# Altium PCB music_51.PcbDoc
Units mil, origin at the board's own origin, x right, y up, seen from the top; angles counter-clockwise.
Board outline 3685.33 x 2060.08 mil, 2 copper layers (Top Layer, Bottom Layer); 137 components, 55 nets, 407 pads, 160 vias.
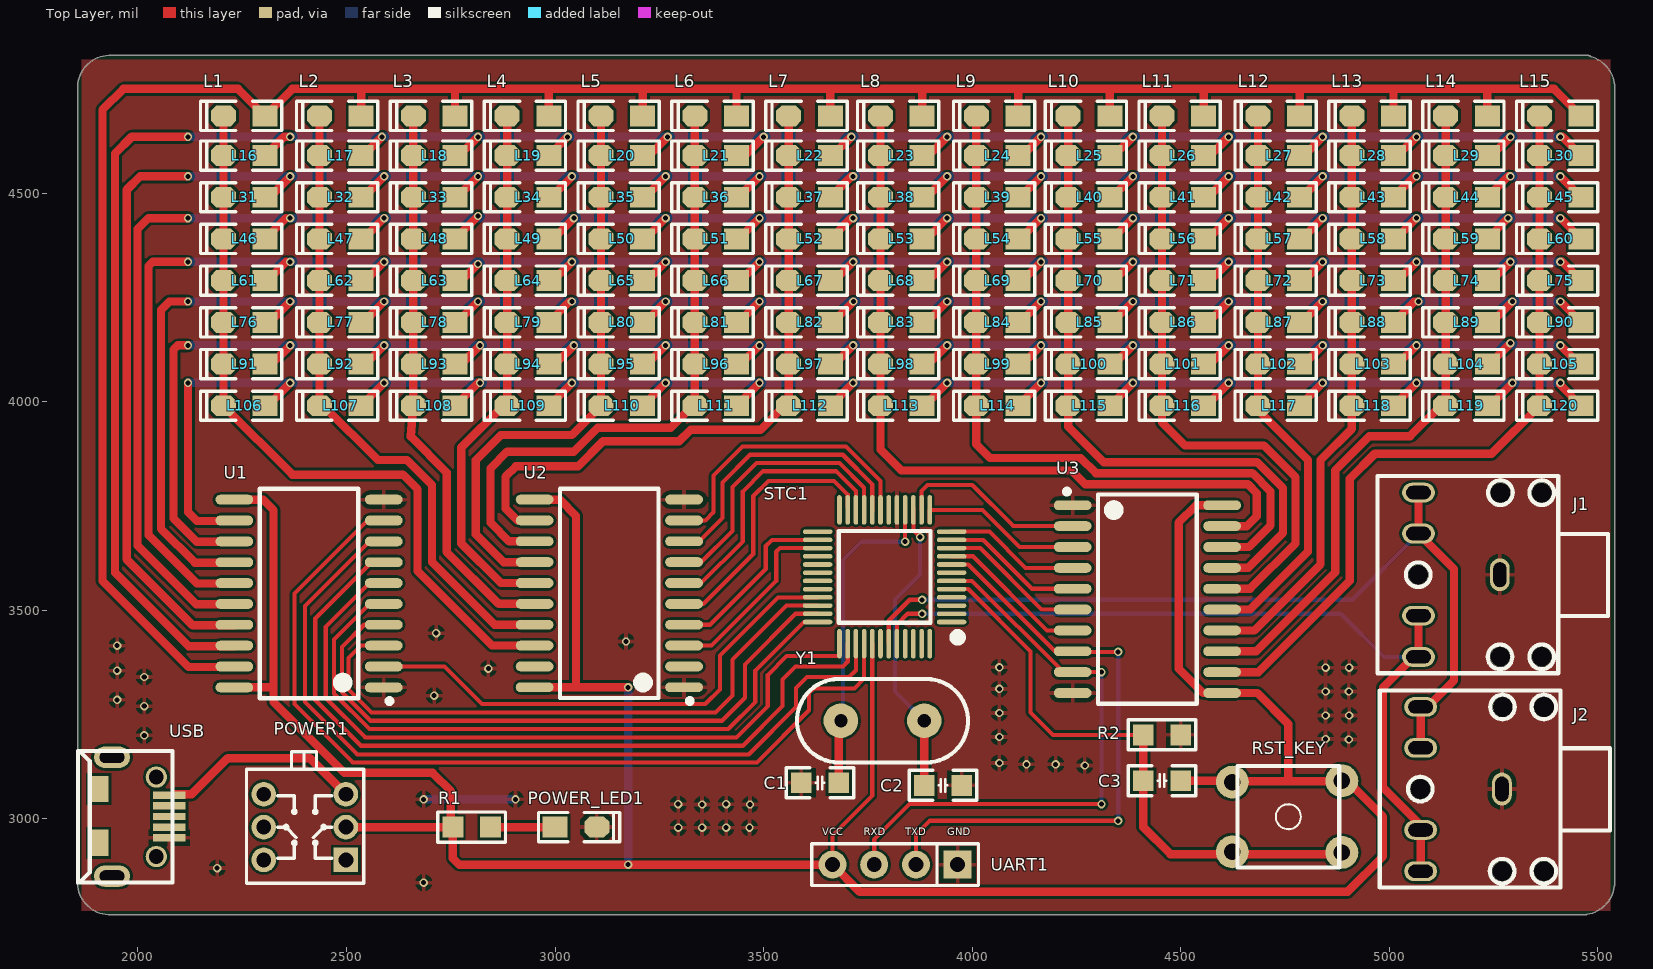
[diagram p0: Top Layer view]
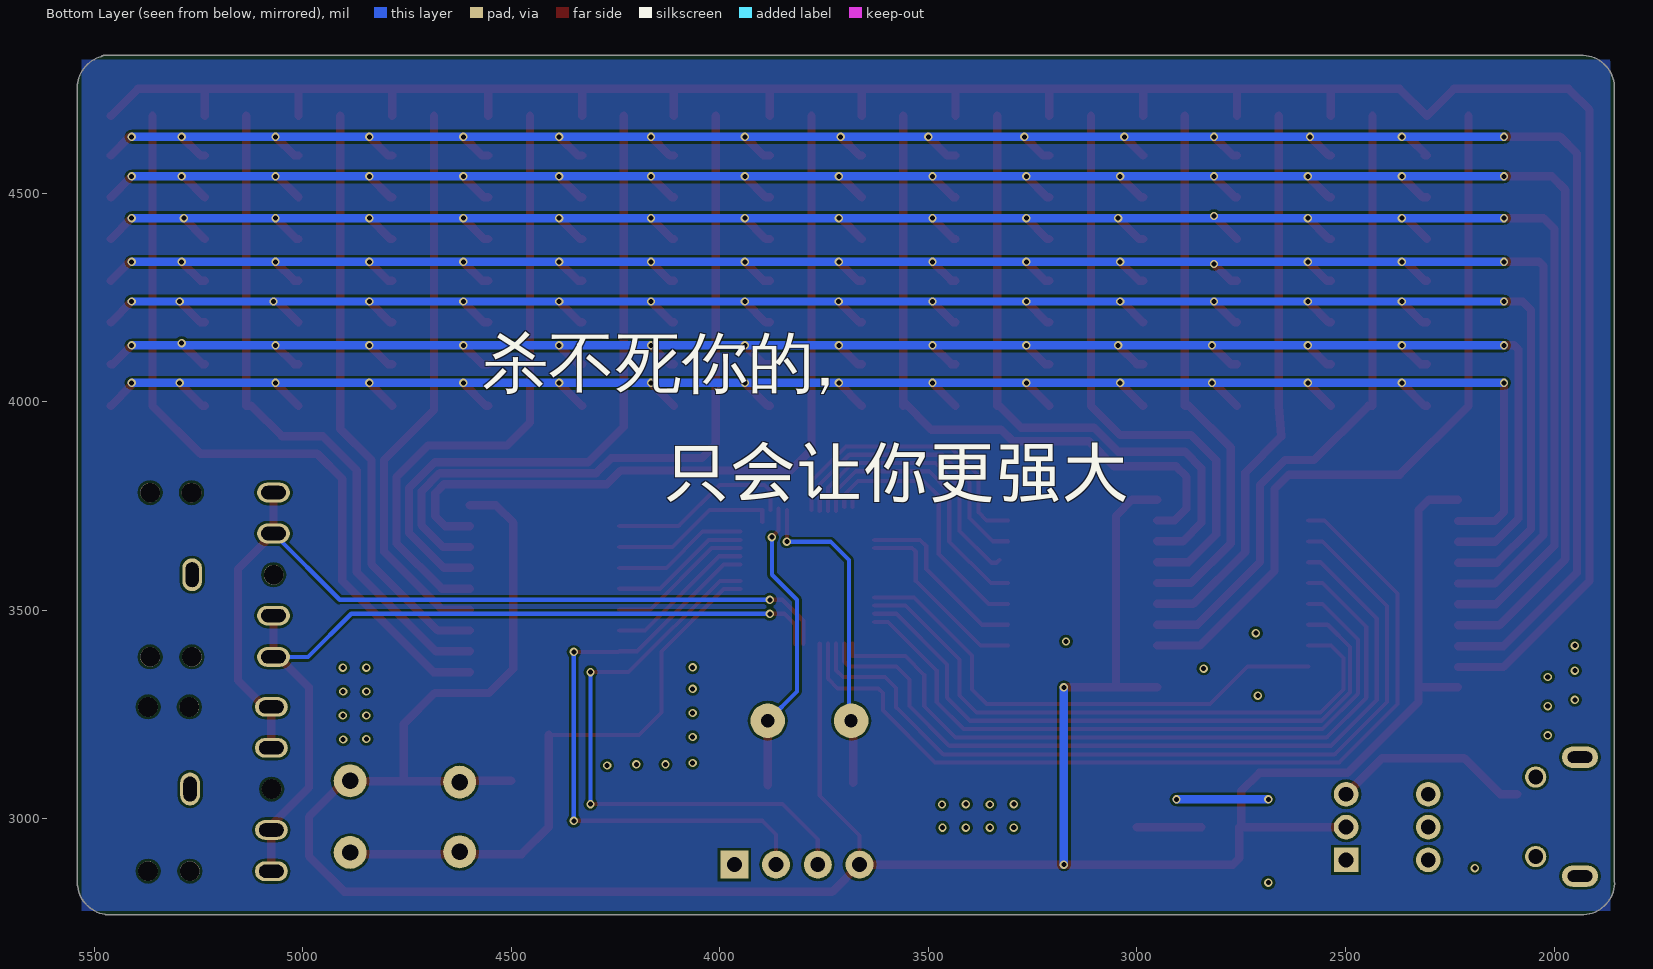
[diagram p1: Bottom Layer view, seen from below]

## Layer stack, top to bottom
Top Solder: solder mask 0.4, Solder Resist, Dk 3.5
Top Layer: signal copper 1.4
Dielectric 1: dielectric 12.6, FR-4, Dk 4.8
Bottom Layer: signal copper 1.4
Bottom Solder: solder mask 0.4, Solder Resist, Dk 3.5

## Board outline
1935.11,2769.99 cw(c1932.24,2847.5) 1854.73,2844.63 cw(c1864.74,2845) 1854.99,2847.27 1854.99,4749.82 cw(c1932.5,4752.5) 1929.63,4830.01 cw(c1930,4820) 1930,4830.02 5459.82,4830.02 cw(c5462.5,4752.5) 5465.18,4830.02 5476,4830.02 cw(c5476,4820) 5482.79,4827.36 cw(c5462.5,4752.5) 5539.22,4763.92 cw(c5530,4760) 5540.02,4760 5540.02,2850.18 cw(c5462.5,2847.5) 5540.06,2847.5 cw(c5462.5,2847.5) 5540.02,2844.82 5540.02,2841.31 cw(c5530,2841.31) 5539.49,2838.12 cw(c5462.5,2847.5) 5473.92,2770.78 cw(c5470,2780) 5470,2769.98 1937.44,2769.98 cw(c1937.44,2780) 1936.09,2770.08 cw(c1934.74,2780)

## Design rules (kind name [scope] priority, off if disabled: settings)
Clearance [All] p1: gap=6 ignorepadtopadclearanceinfootprint=FALSE
PolygonConnect [All] p1: connectstyle=Relief reliefconductorwidth=10 reliefentries=4 polygonreliefangle="90 Angle" airgapwidth=10
RoutingVias [All] p1: holewidth=28 width=50 viastyle="Through Hole" minholewidth=28 minwidth=50 maxholewidth=28 maxwidth=50
SolderMaskExpansion [All] p1: expansion=4
Width [All] p1: maxlimit=25 minlimit=10 preferedwidth=20 minimp=50.000000 maximp=50.000000 favimp=50.000000
30 further rules are at their usual default settings.

## Components (designator, comment, footprint, x,y, rotation, side; value= is the part's Value field where it differs from the comment)
C1 "30pf" CAP-0805 3635,3086.15 r180 top
C2 "30pf" CAP-0805 3930,3080 r180 top
C3 "10uf" CAP-0805 4455,3091.15 r180 top
J1 "PJ-307C" PJ-307C 5265,3585 r270 top
J2 "PJ-307C" PJ-307C 5270,3071.15 r270 top
L1 "LED" LED 2255,4685 r180 top
L2 "LED" LED 2485,4685 r180 top
L3 "LED" LED 2710,4685 r180 top
L4 "LED" LED 2935,4685 r180 top
L5 "LED" LED 3160,4685 r180 top
L6 "LED" LED 3385,4685 r180 top
L7 "LED" LED 3610,4685 r180 top
L8 "LED" LED 3830,4685 r180 top
L9 "LED" LED 4060,4685 r180 top
L10 "LED" LED 4280,4685 r180 top
L11 "LED" LED 4505,4685 r180 top
L12 "LED" LED 4735,4685 r180 top
L13 "LED" LED 4960,4685 r180 top
L14 "LED" LED 5185,4685 r180 top
L15 "LED" LED 5410,4685 r180 top
L16 "LED" LED 2255,4590 r180 top
L17 "LED" LED 2485,4590 r180 top
L18 "LED" LED 2710,4590 r180 top
L19 "LED" LED 2935,4590 r180 top
L20 "LED" LED 3160,4590 r180 top
L21 "LED" LED 3385,4590 r180 top
L22 "LED" LED 3610,4590 r180 top
L23 "LED" LED 3830,4590 r180 top
L24 "LED" LED 4060,4590 r180 top
L25 "LED" LED 4280,4590 r180 top
L26 "LED" LED 4505,4590 r180 top
L27 "LED" LED 4735,4590 r180 top
L28 "LED" LED 4960,4590 r180 top
L29 "LED" LED 5185,4590 r180 top
L30 "LED" LED 5410,4590 r180 top
L31 "LED" LED 2255,4490 r180 top
L32 "LED" LED 2485,4490 r180 top
L33 "LED" LED 2710,4490 r180 top
L34 "LED" LED 2935,4490 r180 top
L35 "LED" LED 3160,4490 r180 top
L36 "LED" LED 3385,4490 r180 top
L37 "LED" LED 3610,4490 r180 top
L38 "LED" LED 3830,4490 r180 top
L39 "LED" LED 4060,4490 r180 top
L40 "LED" LED 4280,4490 r180 top
L41 "LED" LED 4505,4490 r180 top
L42 "LED" LED 4735,4490 r180 top
L43 "LED" LED 4960,4490 r180 top
L44 "LED" LED 5185,4490 r180 top
L45 "LED" LED 5410,4490 r180 top
L46 "LED" LED 2255,4390 r180 top
L47 "LED" LED 2485,4390 r180 top
L48 "LED" LED 2710,4390 r180 top
L49 "LED" LED 2935,4390 r180 top
L50 "LED" LED 3160,4390 r180 top
L51 "LED" LED 3385,4390 r180 top
L52 "LED" LED 3610,4390 r180 top
L53 "LED" LED 3830,4390 r180 top
L54 "LED" LED 4060,4390 r180 top
L55 "LED" LED 4280,4390 r180 top
L56 "LED" LED 4505,4390 r180 top
L57 "LED" LED 4735,4390 r180 top
L58 "LED" LED 4960,4390 r180 top
L59 "LED" LED 5185,4390 r180 top
L60 "LED" LED 5410,4390 r180 top
L61 "LED" LED 2255,4290 r180 top
L62 "LED" LED 2485,4290 r180 top
L63 "LED" LED 2710,4290 r180 top
L64 "LED" LED 2935,4290 r180 top
L65 "LED" LED 3160,4290 r180 top
L66 "LED" LED 3385,4290 r180 top
L67 "LED" LED 3610,4290 r180 top
L68 "LED" LED 3830,4290 r180 top
L69 "LED" LED 4060,4290 r180 top
L70 "LED" LED 4280,4290 r180 top
L71 "LED" LED 4505,4290 r180 top
L72 "LED" LED 4735,4290 r180 top
L73 "LED" LED 4960,4290 r180 top
L74 "LED" LED 5185,4290 r180 top
L75 "LED" LED 5410,4290 r180 top
L76 "LED" LED 2255,4190 r180 top
L77 "LED" LED 2485,4190 r180 top
L78 "LED" LED 2710,4190 r180 top
L79 "LED" LED 2935,4190 r180 top
L80 "LED" LED 3160,4190 r180 top
L81 "LED" LED 3385,4190 r180 top
L82 "LED" LED 3610,4190 r180 top
L83 "LED" LED 3830,4190 r180 top
L84 "LED" LED 4060,4190 r180 top
L85 "LED" LED 4280,4190 r180 top
L86 "LED" LED 4505,4190 r180 top
L87 "LED" LED 4735,4190 r180 top
L88 "LED" LED 4960,4190 r180 top
L89 "LED" LED 5185,4190 r180 top
L90 "LED" LED 5410,4190 r180 top
L91 "LED" LED 2255,4090 r180 top
L92 "LED" LED 2485,4090 r180 top
L93 "LED" LED 2710,4090 r180 top
L94 "LED" LED 2935,4090 r180 top
L95 "LED" LED 3160,4090 r180 top
L96 "LED" LED 3385,4090 r180 top
L97 "LED" LED 3610,4090 r180 top
L98 "LED" LED 3830,4090 r180 top
L99 "LED" LED 4060,4090 r180 top
L100 "LED" LED 4280,4090 r180 top
L101 "LED" LED 4505,4090 r180 top
L102 "LED" LED 4735,4090 r180 top
L103 "LED" LED 4960,4090 r180 top
L104 "LED" LED 5185,4090 r180 top
L105 "LED" LED 5410,4090 r180 top
L106 "LED" LED 2255,3990 r180 top
L107 "LED" LED 2485,3990 r180 top
L108 "LED" LED 2710,3990 r180 top
L109 "LED" LED 2935,3990 r180 top
L110 "LED" LED 3160,3990 r180 top
L111 "LED" LED 3385,3990 r180 top
L112 "LED" LED 3610,3990 r180 top
L113 "LED" LED 3830,3990 r180 top
L114 "LED" LED 4060,3990 r180 top
L115 "LED" LED 4280,3990 r180 top
L116 "LED" LED 4505,3990 r180 top
L117 "LED" LED 4735,3990 r180 top
L118 "LED" LED 4960,3990 r180 top
L119 "LED" LED 5185,3990 r180 top
L120 "LED" LED 5410,3990 r180 top
POWER1 "SWITCH" KEY6 2400,2980 r90 top
POWER_LED1 "LED_Red" LED 3050,2980 r0 top
R1 "2K" RES-S0805 2800,2980 r0 top
R2 "RES-2" RES-S0805 4455,3201.15 r0 top
RST_KEY "Key" KEY4 4755,3005 r0 top (schematic designator RST1)
STC1 "STC12C5A60S2" LQPF48_7*7 3790,3580 r90 top
U1 "74HC573" SOIC-20 2410,3540 r180 top
U2 "74HC573" SOIC-20 3130,3540.15 r180 top
U3 "74HC573" SOIC-20 4420,3526.48 r0 top
UART1 "Header 1*4" "Header 1*4" 3815,2890 r180 top
USB "USB_M" MICRO_USB 1990,3005 r180 top (schematic designator USB1)
Y1 "24M" XTAL 3785,3235 r180 top

## Footprints (in the part's own frame and the unit in brackets; to place one, negate y for a bottom-side part, rotate by r counter-clockwise, add the part's x,y. Pads: shape width x height; smd on the part's side, far side on the other; paste and mask are expansions set on the pad)
CAP-0805 [mil] "0805"
  rect 50x50 smd: 1(-45,0) 2(45,0)
  silkscreen extent -81,-36 81,36, body extent -39,-24 39,24, height 20
"Header 1*4" [mm]
  rect 1.7x1.7 hole 0.9: 1(-3.81,0)
  round 1.7 hole 0.9: 2(-1.27,0) 3(1.27,0) 4(3.81,0)
  silkscreen extent -5.08,-1.27 5.08,1.27, body extent -5.08,-1.27 5.08,1.27, height 8.5
KEY4 [mm]
  round 2 hole 1: 1(-3.336,2.107) 1(3.336,2.181) 2(-3.336,-2.142) 2(3.336,-2.181)
  silkscreen extent -3.03,-3.1 3.17,3.09, body extent -4.09,-3.28 4.18,3.22, height 4.3
KEY6 [mm]
  rect 1.5x1.5 hole 0.9: 1(-2,-2.5)
  round 1.5 hole 0.9: 2(0,-2.5) 3(2,-2.5) 4(2,2.5) 5(0,2.5) 6(-2,2.5)
  silkscreen extent -3.42,-3.58 4.58,3.56, body extent -3.5,-3.5 3.5,3.5, height 11.2
LED [mil]
  rect 60x50 smd: 1(-50,0)
  oct 60x50 smd: 2(50,0)
  silkscreen extent -90,-35 105,35, body extent -39,-25 39,25, height 32
LQPF48_7*7 [mil]
  oval 11x70.87 smd: 1(-108.27,-160.45) 2(-88.59,-160.45) 3(-68.9,-160.45) 4(-49.22,-160.45) 5(-29.53,-160.45) 6(-9.85,-160.45) 7(9.84,-160.45) 8(29.52,-160.45) 9(49.21,-160.45) 10(68.89,-160.45) 11(88.58,-160.45) 12(108.26,-160.45) 25(108.26,160.45) 26(88.58,160.45) 27(68.89,160.45) 28(49.21,160.45) 29(29.52,160.45) 30(9.84,160.45) 31(-9.85,160.45) 32(-29.53,160.45) 33(-49.22,160.45) 34(-68.9,160.45) 35(-88.59,160.45) 36(-108.27,160.45)
  oval 70.87x11 smd: 13(160.45,-108.27) 14(160.45,-88.59) 15(160.45,-68.9) 16(160.45,-49.22) 17(160.45,-29.53) 18(160.45,-9.85) 19(160.45,9.84) 20(160.45,29.52) 21(160.45,49.21) 22(160.45,68.89) 23(160.45,88.58) 24(160.45,108.26) 37(-160.45,108.26) 38(-160.45,88.58) 39(-160.45,68.89) 40(-160.45,49.21) 41(-160.45,29.52) 42(-160.45,9.84) 43(-160.45,-9.85) 44(-160.45,-29.53) 45(-160.45,-49.22) 46(-160.45,-68.9) 47(-160.45,-88.59) 48(-160.45,-108.27)
  silkscreen extent -155,-185 110,110, body extent -177,-177 177,177, height 57
MICRO_USB [mm] "MICRO USB 5S B 型牛角"
  round 1.3 hole 0.9: 0(-1.371,2.431) 0(-1.371,-2.41)
  oval 2.2x1.3 hole 0.7 slot 1.5 at 0 deg: 0(1.329,3.619) 0(1.329,-3.619)
  rect 1.2x1.6 smd: 0(2.14,-1.683) 0(2.156,1.596)
  rect 2x0.45 smd: 1(-2.156,-1.31) 2(-2.156,-0.66) 3(-2.156,-0.01) 4(-2.156,0.64) 5(-2.156,1.29)
  silkscreen extent -2.36,-4 3.4,4
PJ-307C [mm] "3.5mm耳机接口"
  round 1.2 hole 1.2: 0(-5,2.554) 0(-5,0.04) 0(0,-4.964) 0(5,2.554) 0(5,0.014)
  oval 2x1.2 hole 0.8 slot 1.5 at 0 deg: 1(0,0)
  oval 1.2x2 hole 0.8 slot 1.5 at 90 deg: 2(5.004,-4.953) 3(2.489,-4.953) 4(-2.511,-4.953) 5(-5.004,-4.953)
  silkscreen extent -6.01,-7.44 5.99,6.58
RES-S0805 [mil]
  rect 50x50 smd: 1(-45,0) 2(45,0)
  silkscreen extent -81,-36 81,36, body extent -39,-25 39,25, height 20
SOIC-20 [mm]
  oval 2.3x0.6 smd: 1(-4.55,5.715) 2(-4.55,4.445) 3(-4.55,3.175) 4(-4.55,1.905) 5(-4.55,0.635) 6(-4.55,-0.635) 7(-4.55,-1.905) 8(-4.55,-3.175) 9(-4.55,-4.445) 10(-4.55,-5.715) 11(4.55,-5.715) 12(4.55,-4.445) 13(4.55,-3.175) 14(4.55,-1.905) 15(4.55,-0.635) 16(4.55,0.635) 17(4.55,1.905) 18(4.55,3.175) 19(4.55,4.445) 20(4.55,5.715)
  silkscreen extent -5.05,-6.37 3,6.7, body extent -5.3,-6.5 5.3,6.5, height 2.57
XTAL [mm]
  round 2.1 hole 0.8: 1(-2.54,0) 2(2.54,0)
  silkscreen extent -5.2,-2.54 5.2,2.54, body extent -5.52,-2.32 5.53,2.33, height 4.13

## Part data
C1 C2: library part Cap
C3: library part Cap3+
R1: library part RES-2
Y1: library part 晶振

## Via types
v1: diameter 20, hole 12, Top Layer to Bottom Layer, 159 vias
v2: diameter 20/20 (per signal layer), hole 12, Top Layer to Bottom Layer, 1 vias

## Nets (pads, with @x,y where several pads share a name; then routed paths per layer and width w, separated by ;. In a path a pad name is that pad's centre, name@x,y a point inside that pad or via, vN(x,y) a via of type N, cw(c..) or ccw(c..) an arc to the next point about the centre after c; other vN are vias at no path point)
00: L106.1 L107.1 L108.1 L109.1 L110.1 L111.1 L112.1 L113.1 L114.1 L115.1 L116.1 L117.1 L118.1 L119.1 L120.1 U1.12 | length 4908.2
  Top Layer w20: v1(2120,4045) 2120,3735 2141.15,3713.85 U1.12@2230,3713.85 ; L106.1 2310,3990 v1(2365,4045) ; L107.1 v1(2590,4045) ; L108.1 2815,4045 v1(2820,4045) ; L109.1 v1(3040,4045) ; L110.1 v1(3265,4045) ; L111.1 v1(3490,4045) ; L112.1 3714.52,4044.52 v1(3714.52,4045) ; L113.1 3885,3990 v1(3940,4045) ; L114.1 v1(4165,4045) ; L115.1 v1(4385,4045) ; L116.1 4560,3990 v1(4615,4045) ; L117.1 v1(4840,4045) ; L118.1 v1(5065,4045) ; L119.1 5240,3990 v1(5295,4045) ; v1(5410,4045) 5410,4040 L120.1
  Bottom Layer w20: v1(2120,4045) v1(2365,4045) v1(2590,4045) v1(2820,4045) v1(3040,4045) v1(3265,4045) v1(3490,4045) v1(3714.52,4045) v1(3940,4045) v1(4165,4045) v1(4385,4045) v1(4615,4045) v1(4840,4045) v1(5065,4045) v1(5295,4045) v1(5410,4045)
01: L91.1 L92.1 L93.1 L94.1 L95.1 L96.1 L97.1 L98.1 L99.1 L100.1 L101.1 L102.1 L103.1 L104.1 L105.1 U1.13 | length 5028.6
  Top Layer w20: v1(2120,4135) 2095,4135 2085,4125 2085,3720 2141.15,3663.85 U1.13@2230,3663.85 ; L91.1 2320,4090 v1(2365,4135) ; L92.1 2545,4090 v1(2590,4135) ; L93.1 2775,4090 v1(2820,4135) ; L94.1 3000,4090 v1(3045,4135) ; L95.1 3220,4090 v1(3265,4135) ; L96.1 3445,4090 v1(3490,4135) ; L97.1 3669.52,4090 v1(3714.52,4135) ; L98.1 3895,4090 v1(3940,4135) ; L99.1 4120,4090 v1(4165,4135) ; L100.1 4340,4090 v1(4385,4135) ; L101.1 4570,4090 v1(4615,4135) ; L102.1 4795,4090 v1(4840,4135) ; L103.1 5020,4090 v1(5065,4135) ; L104.1 5240,4090 v1(5290,4140) ; v1(5410,4135) 5455,4090 L105.1
  Bottom Layer w20: v1(2120,4135) v1(2365,4135) v1(2590,4135) v1(2820,4135) v1(3045,4135) v1(3265,4135) v1(3490,4135) v1(3714.52,4135) v1(3940,4135) v1(4165,4135) v1(4385,4135) v1(4615,4135) v1(4840,4135) v1(5065,4135) v1(5410,4135)
02: L76.1 L77.1 L78.1 L79.1 L80.1 L81.1 L82.1 L83.1 L84.1 L85.1 L86.1 L87.1 L88.1 L89.1 L90.1 U1.14 | length 5252.6
  Top Layer w20: v1(2120,4240) 2075,4240 2055,4220 2055,3695 2136.15,3613.85 U1.14@2230,3613.85 ; L76.1 2315,4190 v1(2365,4240) ; L77.1 2540,4190 v1(2590,4240) ; L78.1 2765,4190 v1(2815,4240) ; L79.1 3035,4240 v1(3040,4240) ; L80.1 3215,4190 v1(3265,4240) ; L81.1 3440,4190 v1(3490,4240) ; L82.1 3665,4190 v1(3715,4240) ; L83.1 3890,4190 v1(3940,4240) ; L84.1 4115,4190 v1(4165,4240) ; L85.1 4335,4190 v1(4385,4240) ; L86.1 4565,4190 v1(4615,4240) ; L87.1 4790,4190 v1(4840,4240) ; L88.1 5060,4240 v1(5070,4240) ; L89.1 5245,4190 v1(5295,4240) ; v1(5410,4240) L90.1
  Bottom Layer w20: v1(2120,4240) v1(2365,4240) v1(2590,4240) v1(2815,4240) v1(3040,4240) v1(3265,4240) v1(3490,4240) v1(3715,4240) v1(3940,4240) v1(4165,4240) v1(4385,4240) v1(4615,4240) v1(4840,4240) v1(5070,4240) v1(5295,4240) v1(5410,4240)
03: L61.1 L62.1 L63.1 L64.1 L65.1 L66.1 L67.1 L68.1 L69.1 L70.1 L71.1 L72.1 L73.1 L74.1 L75.1 U1.15 | length 5389.3
  Top Layer w20: v1(2120,4335) 2035,4335 2025,4325 2025,3680 2141.15,3563.85 U1.15@2230,3563.85 ; L61.1 2310,4290 v1@2355,4335 ; L62.1 2545,4290 v1(2590,4335) ; L63.1 2775,4290 v1(2815,4330) ; L64.1 2995,4290 v1(3040,4335) ; L65.1 3220,4290 v1(3265,4335) ; L66.1 3445,4290 v1(3490,4335) ; L67.1 3669.52,4290 v1(3714.52,4335) ; L68.1 3895,4290 v1(3940,4335) ; L69.1 4120,4290 v1(4165,4335) ; L70.1 4340,4290 v1(4385,4335) ; L71.1 4570,4290 v1(4615,4335) ; L72.1 4795,4290 v1(4840,4335) ; L73.1 5020,4290 v1(5065,4335) ; L74.1 5245,4290 v1(5290,4335) ; v1(5410,4335) 5415,4335 L75.1
  Bottom Layer w20: v1(2120,4335) v1(2365,4335) v1(2590,4335) v1(3040,4335) v1(3265,4335) v1(3490,4335) v1(3714.52,4335) v1(3940,4335) v1(4165,4335) v1(4385,4335) v1(4615,4335) v1(4840,4335) v1(5065,4335) v1(5290,4335) v1(5410,4335)
04: L46.1 L47.1 L48.1 L49.1 L50.1 L51.1 L52.1 L53.1 L54.1 L55.1 L56.1 L57.1 L58.1 L59.1 L60.1 U1.16 | length 5607.6
  Top Layer w20: v1(2120,4440) 2025,4440 1999,4414 1999,3654.85 2140,3513.85 U1.16@2230,3513.85 ; L46.1 2355,4440 ; L47.1 2540,4390 v1(2590,4440) ; L48.1 v1(2815,4445) ; L49.1 2995,4390 v1(3045,4440) ; L50.1 3215,4390 v1(3265,4440) ; L51.1 3440,4390 v1(3490,4440) ; L52.1 3710,4440 v1(3714.52,4440) ; L53.1 3890,4390 v1(3940,4440) ; L54.1 4115,4390 v1(4165,4440) ; L55.1 4335,4390 v1(4385,4440) ; L56.1 4565,4390 v1(4615,4440) ; L57.1 4790,4390 v1(4840,4440) ; L58.1 5015,4390 v1(5065,4440) ; L59.1 v1(5285,4440) ; v1(5410,4440) L60.1
  Bottom Layer w20: v1(2120,4440) v1(2365,4440) v1(2590,4440) v1(3045,4440) v1(3265,4440) v1(3490,4440) v1(3714.52,4440) v1(3940,4440) v1(4165,4440) v1(4385,4440) v1(4615,4440) v1(4840,4440) v1(5065,4440) v1(5285,4440) v1(5410,4440)
05: L31.1 L32.1 L33.1 L34.1 L35.1 L36.1 L37.1 L38.1 L39.1 L40.1 L41.1 L42.1 L43.1 L44.1 L45.1 U1.17 | length 5803.9
  Top Layer w20: v1(2120,4540) 2005,4540 1973,4508 1973,3622 2131.15,3463.85 U1.17@2230,3463.85 ; L31.1 2315,4490 v1(2365,4540) ; L32.1 2540,4490 v1(2590,4540) ; L33.1 2765,4490 v1(2815,4540) ; L34.1 2990,4490 v1(3040,4540) ; L35.1 3215,4490 v1(3265,4540) ; L36.1 3440,4490 v1(3490,4540) ; L37.1 3710,4540 v1(3714.52,4540) ; L38.1 3890,4490 v1(3940,4540) ; L39.1 4115,4490 v1(4165,4540) ; L40.1 4335,4490 v1(4385,4540) ; L41.1 4565,4490 v1(4615,4540) ; L42.1 4790,4490 v1(4840,4540) ; L43.1 5060,4540 v1(5065,4540) ; L44.1 5285,4540 v1(5290,4540) ; v1(5410,4540) L45.1
  Bottom Layer w20: v1(2120,4540) v1(2365,4540) v1(2590,4540) v1(2815,4540) v1(3040,4540) v1(3265,4540) v1(3490,4540) v1(3714.52,4540) v1(3940,4540) v1(4165,4540) v1(4385,4540) v1(4615,4540) v1(4840,4540) v1(5065,4540) v1(5290,4540) v1(5410,4540)
06: L16.1 L17.1 L18.1 L19.1 L20.1 L21.1 L22.1 L23.1 L24.1 L25.1 L26.1 L27.1 L28.1 L29.1 L30.1 U1.18 | length 5959.1
  Top Layer w20: v1(2120,4635) 1985,4635 1945,4595 1945,3590 2121.15,3413.85 U1.18@2230,3413.85 ; L16.1@2310,4590 L16.1 2350,4635 v1(2365,4635) ; L17.1 2540,4590 v1(2585,4635) ; L18.1 2770,4590 v1(2815,4635) ; L19.1 v1(3030,4635) ; L20.1 3225,4590 v1(3270,4635) ; L21.1 3455,4590 v1(3500,4635) ; L22.1 3665,4590 v1(3710,4635) ; L23.1 3895,4590 v1(3940,4635) ; L24.1 4120,4590 v1(4165,4635) ; L25.1 4340,4590 v1(4385,4635) ; L26.1 4570,4590 v1(4615,4635) ; L27.1 4795,4590 v1(4840,4635) ; L28.1 5020,4590 v1(5065,4635) ; L29.1 5245,4590 v1(5290,4635) ; v1(5410,4635) 5415,4635 L30.1
  Bottom Layer w20: v1(2120,4635) v1(2365,4635) v1(2815,4635) v1(3030,4635) v1(3270,4635) v1(3710,4635) v1(3940,4635) v1(4840,4635) v1(5065,4635) v1(5290,4635) v1(5410,4635)
07: L1.1 L2.1 L3.1 L4.1 L5.1 L6.1 L7.1 L8.1 L9.1 L10.1 L11.1 L12.1 L13.1 L14.1 L15.1 U1.19 | length 6021.9
  Top Layer w20: U1.19@2230,3363.85 2121.15,3363.85 1915,3570 1915,4700 1965,4750 2240,4750 L1.1 2370,4750 2535,4750 ; L2.1 2535,4750 ; L3.1 2760,4750 ; L4.1 2985,4750 ; L5.1 3210,4750 ; L6.1 3435,4750 ; L7.1 3660,4750 ; L8.1 3880,4750 ; L9.1 4110,4750 ; L10.1 4330,4750 ; L11.1 4555,4750 ; L12.1 4785,4750 ; L13.1 5010,4750 ; L14.1 5235,4750 ; L15.1 5395,4750 5235,4750 ; 2535,4750 2760,4750 ; 2760,4750 2985,4750 ; 2985,4750 3210,4750 ; 3210,4750 3435,4750 ; 3435,4750 3660,4750 ; 3660,4750 3880,4750 ; 3880,4750 4110,4750 ; 4110,4750 4330,4750 ; 4330,4750 4555,4750 ; 4555,4750 4785,4750 ; 4785,4750 5010,4750 ; 5010,4750 5235,4750
20: L7.2 L22.2 L37.2 L52.2 L67.2 L82.2 L97.2 L112.2 U2.12 | length 1606.7
  Top Layer w20: U2.12 2909.44,3715.15 2881,3743.59 2881,3820.07 2905.93,3845 3055,3845 3115,3905 3297.5,3905 3325,3932.5 3492.5,3932.5 L112.2@3560,4000 ; L112.2 L112.2@3560,4000 ; L7.2 L22.2 L37.2 L52.2 L67.2 L82.2 L97.2 L112.2@3560,4000
21: L6.2 L21.2 L36.2 L51.2 L66.2 L81.2 L96.2 L111.2 U2.13 | length 1503.6
  Top Layer w20: U2.13 2889.85,3665.15 2845,3710 2845,3840 2885,3880 3045,3880 3102.5,3937.5 3277.5,3937.5 L111.2@3335,3995 ; L111.2 L111.2@3335,3995 ; L6.2 L21.2 L36.2 L51.2 L66.2 L81.2 L96.2 L111.2@3335,3995
22: L5.2 L20.2 L35.2 L50.2 L65.2 L80.2 L95.2 L110.2 U2.14 | length 1395.7
  Top Layer w20: U2.14 2876.34,3615.15 2810,3681.49 2810,3860 2870,3920 3040,3920 L110.2 L95.2 L80.2 L65.2 L50.2 L35.2 L20.2 L5.2
23: L4.2 L19.2 L34.2 L49.2 L64.2 L79.2 L94.2 L109.2 U2.15 | length 1291.6
  Top Layer w20: L4.2 L19.2 L34.2 L49.2 L64.2 L79.2 L94.2 L109.2 2875,3990 2775,3890 2775,3660 2869.85,3565.15 U2.15
24: L3.2 L18.2 L33.2 L48.2 L63.2 L78.2 L93.2 L108.2 U2.16 | length 1343.4
  Top Layer w20: L3.2 L18.2 L33.2 L48.2 L63.2 L78.2 L93.2 L108.2 2654,3916 2740,3830 2740,3640 2864.84,3515.15 U2.16
25: L2.2 L17.2 L32.2 L47.2 L62.2 L77.2 L92.2 L107.2 U2.17 | length 1536.6
  Top Layer w20: L2.2 L17.2 L32.2 L47.2 L62.2 L77.2 L92.2 L107.2 2445,3990 2575,3860 2645,3860 2705,3800 2705,3615 2854.85,3465.15 U2.17
26: L1.2 L16.2 L31.2 L46.2 L61.2 L76.2 L91.2 L106.2 U2.18 | length 1793.9
  Top Layer w20: L1.2 L16.2 L31.2 L46.2 L61.2 L76.2 L91.2 L106.2 2370,3825 2635,3825 2670,3790 2670,3593.85 2848.7,3415.15 U2.18
30: L15.2 L30.2 L45.2 L60.2 L75.2 L90.2 L105.2 L120.2 U3.12 | length 1863.9
  Top Layer w20: U3.12 4686.48,3351.48 4905,3570 4905,3815 4965,3875 5245,3875 L120.2 L105.2 L90.2 L75.2 L60.2 L45.2 L30.2 L15.2
31: L14.2 L29.2 L44.2 L59.2 L74.2 L89.2 L104.2 L119.2 U3.13 | length 1617.7
  Top Layer w20: U3.13 4680.69,3401.48 4870,3590.78 4870,3835 4952.12,3917.12 5050,3917.12 5122.88,3990 L119.2 L104.2 L89.2 L74.2 L59.2 L44.2 L29.2 L14.2
32: L13.2 L28.2 L43.2 L58.2 L73.2 L88.2 L103.2 L118.2 U3.14 | length 1407.6
  Top Layer w20: U3.14 4676.48,3451.48 4835,3610 4835,3860 4910,3935 L118.2 L103.2 L88.2 L73.2 L58.2 L43.2 L28.2 L13.2
33: L12.2 L27.2 L42.2 L57.2 L72.2 L87.2 L102.2 L117.2 U3.15 | length 1357.9
  Top Layer w20: U3.15 4666.32,3501.48 4805,3640.15 4805,3860 4685,3980 L117.2 L102.2 L87.2 L72.2 L57.2 L42.2 L27.2 L12.2
34: L11.2 L26.2 L41.2 L56.2 L71.2 L86.2 L101.2 L116.2 U3.16 | length 1489.1
  Top Layer w20: L11.2 L26.2 L41.2 L56.2 L71.2 L86.2 L101.2 L116.2 4455,3950 4510,3895 4699.07,3895 4775,3819.07 4775,3660 4666.48,3551.48 U3.16
35: L10.2 L25.2 L40.2 L55.2 L70.2 L85.2 L100.2 L115.2 U3.17 | length 1609.1
  Top Layer w20: L10.2 L25.2 L40.2 L55.2 L70.2 L85.2 L100.2 L115.2 4230,3940 4315,3855 4682.5,3855 4745,3792.5 4745,3685 4661.48,3601.48 U3.17
36: L9.2 L24.2 L39.2 L54.2 L69.2 L84.2 L99.2 L114.2 U3.18 | length 1758.1
  Top Layer w20: L9.2 L24.2 L39.2 L54.2 L69.2 L84.2 L114.2 4010,3897.59 4042.59,3865 4260,3865 4296.52,3828.48 4671.52,3828.48 4715,3785 4715,3703.3 4663.18,3651.48 U3.18
37: L8.2 L23.2 L38.2 L53.2 L68.2 L83.2 L98.2 L113.2 U3.19 | length 1894
  Top Layer w20: L8.2 L23.2 L38.2 L53.2 L68.2 L83.2 L98.2 L113.2 3780,3885 3830,3835 4237.72,3835 4270.6,3802.12 4660.6,3802.12 4682.5,3780.22 4682.5,3725.45 4658.52,3701.48 U3.19
GND: C1.2 C2.1 J1.1 J2.1 POWER_LED1.2 R2.2 STC1.17 U1.1 U1.10 U2.1 U2.10 U3.1 U3.10 UART1.1 USB.5 | length 220
  Bottom Layer w20: v1(2685,3046.54) v1(2905,3046.54)
  other v1: 2685,2846.57 2190,2881.71 3295.23,2978.47 3352.36,2978.47 3410,2978.47 3466.23,2978.47 3352.36,3034.08 3467.36,3034.08 3295.08,3035 3410,3035 4270,3127.58 4130,3130.48 4200,3130.48 4065,3133.71 4902.77,3190 4847.16,3191.13 4065,3195.87 2015,3200 4847.16,3247.36 4903.69,3247.36 4065,3253.6 2015,3270 1950,3284.93 2710,3295.14 4847.16,3305 4902.77,3305 4065,3311.24 2015,3340 1950,3355 2840,3360 4847.16,3362.13 4903.69,3362.28 4065,3363.01 1950,3415 3170,3425
  other v2: 2715,3445
NetPOWER1_3: POWER1.3 USB.1 | length 482.2
  Top Layer w20: USB.1@2087.73,3058.74 2128.74,3058.74 2215,3145 2412.17,3145 POWER1.3
NetPOWER_LED1_1: POWER_LED1.1 R1.2 | length 155
  Top Layer w20: R1.2 POWER_LED1.1
P0.0: STC1.40 U1.9 | length 2166.6
  Top Layer w10: U1.9 2550,3715 2375,3540 2375,3275 2515,3135 3483.89,3135 3608.89,3260 3608.89,3301.47 3620,3312.58 3717.58,3312.58 3740.79,3335.79 STC1.40
P0.1: STC1.39 U1.8 | length 2030.5
  Top Layer w10: U1.8 2554.85,3665 2400,3510.15 2400,3280 2525.77,3154.23 3464.23,3154.23 3577.5,3267.5 3577.5,3313.29 3604,3339.79 3704.79,3339.79 3721.11,3356.11 STC1.39
P0.2: STC1.38 U1.7 | length 1900.8
  Top Layer w10: U1.7 2560,3615 2425,3480 2425,3285 2535,3175 3450,3175 3545,3270 3545,3333.59 3576.41,3365 3690,3365 3701.42,3376.42 STC1.38
P0.3: STC1.37 U1.6 | length 1778
  Top Layer w10: U1.6 2555,3565 2450,3460 2450,3290 2545,3195 3435,3195 3510,3270 3510,3345 3555,3390 3681.74,3390 STC1.37
P0.4: STC1.36 U1.5 | length 1629.5
  Top Layer w10: U1.5 2555,3515 2470,3430 2470,3299.75 2554.75,3215 3415,3215 3480,3280 3480,3355 3596.73,3471.73 STC1.36
P0.5: STC1.35 U1.4 | length 1552.4
  Top Layer w10: U1.4 2542.37,3465 2489,3411.63 2489,3303.37 2557.37,3235 3400,3235 3455,3290 3455,3370 3576.41,3491.41 STC1.35
P0.6: STC1.34 U1.3 | length 1475.8
  Top Layer w10: U1.3 2534.33,3415 2505,3385.67 2505,3310 2560,3255 3384.86,3255 3425,3295.14 3425,3381.31 3554.79,3511.1 STC1.34
P0.7: STC1.33 U1.2 | length 1231.2
  Top Layer w10: U1.2 2735,3365 2825,3275 3360,3275 3395,3310 3395,3391.1 3534.68,3530.78 STC1.33
P1.0: J1.4 J1.5 J2.4 J2.5 STC1.43 | length 2119.9
  Top Layer w10: STC1.43@3800,3419.55 3800,3474.68 3850.32,3525 v1(3880,3525)
  Top Layer w20: J2.4 J2.5 5091.67,3268.15 5155,3331.48 5155,3598.85 J1.4 J1.5 J1.5@5088,3782
  Bottom Layer w10: v1(3880,3525) 4911.15,3525 J1.4
P1.1: J1.2 J1.3 J2.2 J2.3 STC1.44 | length 2059.4
  Top Layer w10: STC1.44 3819.53,3465.63 3845.32,3491.41 v1(3880,3491.41)
  Top Layer w20: J1.3 J1.2 5058,3388 4985,3315 4985,3075 5075,2985 J2.3 J2.2
  Bottom Layer w10: v1(3880,3491.41) 4883.59,3491.41 4987,3388 J1.2 ; J1.3@5058,3475 J1.3
P2.0: STC1.19 U2.9 | length 699.6
  Top Layer w10: U2.9 U2.9@3336.5,3715.15 ; U2.9@3336.34,3715 U2.9@3336.5,3715.15 ; STC1.19 3780.16,3809.84 3697.73,3892.27 3449.37,3892.27 3380,3822.9 3380,3735 3360.15,3715.15 U2.9@3336.5,3715.15
P2.1: STC1.20 U2.8 | length 680.4
  Top Layer w10: U2.8 3345.15,3665.15 3401.34,3721.34 3401.34,3806.34 3467.59,3872.59 3689.58,3872.59 3760.48,3801.69 STC1.20 STC1.20@3760.48,3737.72
P2.2: STC1.21 U2.7 | length 654.5
  Top Layer w10: U2.7@3330,3620 3336.34,3613.66 3348.66,3613.66 3425,3690 3425,3795.07 3482.83,3852.9 3681.42,3852.9 3740.79,3793.53 STC1.21 STC1.21@3740.79,3737.72
P2.3: STC1.22 U2.6 | length 660.7
  Top Layer w10: U2.6 3350.15,3565.15 3450,3665 3450,3784.84 3498.38,3833.22 3673.27,3833.22 3721.11,3785.38 STC1.22 STC1.22@3721.11,3737.72
P2.4: STC1.23 U2.5 | length 638.5
  Top Layer w10: U2.5 3355.15,3515.15 3475,3635 3475,3773.53 3511.31,3809.84 3668.81,3809.84 3701.42,3777.22 STC1.23@3701.42,3747.72
P2.5: STC1.26 U2.4 | length 436.7
  Top Layer w10: U2.4 3371.19,3465.15 3505,3598.96 3505,3653.58 3520,3668.58 STC1.26
P2.6: STC1.27 U2.3 | length 458.2
  Top Layer w10: U2.3 3375.15,3415.15 3530,3570 3530,3640 3538.89,3648.89 STC1.27
P3.0: STC1.6 U3.9 UART1.3 | length 1407.1
  Top Layer w10: UART1.3 3765,2950.41 3849.59,3035 v1(4310,3035) ; STC1.6 3999.85,3570.15 4218.52,3351.48 U3.9 v1(4310,3351.48)
  Bottom Layer w10: v1(4310,3035) v1(4310,3351.48)
P3.1: STC1.8 U3.8 UART1.2 | length 1462
  Top Layer w10: UART1.2 3865,2961.94 3898.06,2995 v1(4350,2995) ; STC1.8 3990.48,3609.52 4198.52,3401.48 U3.8 4242.35,3400 v1(4350,3400)
  Bottom Layer w10: v1(4350,2995) v1(4350,3400)
P3.2: STC1.9 U3.7 | length 364
  Top Layer w10: STC1.9 4001.89,3629.21 4179.62,3451.48 U3.7
P3.3: STC1.10 U3.6 | length 351.5
  Top Layer w10: STC1.10 4019.15,3648.89 4166.57,3501.48 U3.6
P3.4: STC1.11 U3.5 | length 338.9
  Top Layer w10: STC1.11 4026.42,3668.58 4143.52,3551.48 U3.5
P3.5: STC1.12 U3.4 | length 326.4
  Top Layer w10: STC1.12 4041.26,3688.26 4128.05,3601.48 U3.4
P3.6: STC1.13 U3.3 | length 408.1
  Top Layer w10: STC1.13@3898.27,3711.8 STC1.13 4024.55,3740.45 4113.52,3651.48 U3.3
P3.7: STC1.14 U3.2 | length 454.3
  Top Layer w10: STC1.14 3878.59,3785.71 3892.88,3800 4000,3800 4098.52,3701.48 U3.2
RST: C3.2 R2.1 RST_KEY.2 STC1.5 | length 1424
  Top Layer w10: STC1.5 3990.38,3550.47 4140,3400.85 4140,3255 4193.85,3201.15 R2.1
  Top Layer w20: R2.1 C3.2 4410,2980 4475,2915 4866.76,2915 RST_KEY.2@4887.61,2894.15
VCC: C3.1 POWER1.2 R1.1 RST_KEY.1 STC1.41 U1.11 U1.20 U2.11 U2.20 U3.11 U3.20 UART1.4 | length 7201.8
  Top Layer w10: UART1.4 3665,2960 3760.48,3055.48 STC1.41
  Top Layer w20: U1.20 2325,3315 ; U1.11 2300,3765 2325,3740 2325,3315 ; POWER1.2 2750.15,2980 2750.15,3066.11 2706.36,3109.9 2495.1,3109.9 2325,3280 2325,3315 ; R1.1 2755,2905 2770,2890 UART1.4 3730,2825 4900,2825 4985,2910 4985,3005 4900.5,3089.5 4900.5,3105 4886.35,3090.85 4874.48,3078.98 4863.46,3090 4757.7,3090 4624.8,3090 4623.65,3091.15 C3.1 ; U2.20 3045.15,3315.15 ; U2.11 3011.19,3765.15 3050,3726.34 3050,3320 3045.15,3315.15 ; v1(3175,3315.15) 3045.15,3315.15 ; U3.20 4536.48,3751.48 4495,3710 4495,3360 4553.52,3301.48 U3.11 4683.52,3301.48 4757.7,3227.3 4757.7,3091.15
  Bottom Layer w20: v1(3175,2890) v1(3175,3315.15)
XTAL1: C1.1 STC1.16 Y1.2 | length 754.7
  Top Layer w10: v1(3839.22,3664.22) STC1.16
  Top Layer w20: C1.1 3680,3230 Y1.2
  Bottom Layer w10: Y1.2@3690,3260 3690,3620 3734.22,3664.22 v1(3839.22,3664.22)
XTAL2: C2.2 STC1.15 Y1.1 | length 724.3
  Top Layer w10: STC1.15@3858.9,3743.74 STC1.15 3858.9,3691.1 v1(3875,3675)
  Top Layer w20: C2.2 Y1.1
  Bottom Layer w10: v1(3875,3675) 3875,3585 3815,3525 3815,3305 Y1.1
pads on no net: J1.0 J2.0 POWER1.1 POWER1.4 POWER1.5 POWER1.6 STC1.1 STC1.2 STC1.3 STC1.4 STC1.7 STC1.18 STC1.24 STC1.25 STC1.28 STC1.29 STC1.30 STC1.31 STC1.32 STC1.42 STC1.45 STC1.46 STC1.47 STC1.48 U2.2 U2.19 USB.0 USB.2 USB.3 USB.4
copper on no net: | length 21.3
  Top Layer w10: 3681.74,3747.72 3681.74,3769.07

## Polygon pours and split planes (outlines as drawn)
GND on Top Layer "Top Layer-GND" (solid, pour order 2): 1865,4820 5530,4820 5530,2780 1865,2780
no net on Top Layer "Top Layer-No Net" (solid, pour order 0): 1860,4820
no net on Bottom Layer "Bottom Layer-No Net" (solid, pour order 4): 5530,4820 5530,2780 1865,2780 1865,4815 1860,4820

## Silkscreen, mask and mechanical layers (free items; w line width, h text height)
Top Overlay:
  text "VCC" at 3640,2955 h30
  text "RXD" at 3740,2955 h30
  text "TXD" at 3840,2955 h30
  text "GND" at 3940,2955 h30
Bottom Overlay:
  text "杀不死你的," at 4570,4000 h200
  text "只会让你更强大" at 4135,3735 h200
Mechanical 1:
  lines w20: 1864.74,2845 ccw(c1932.24,2847.5) 1934.74,2780 ; 1865,2842.44 1865,4755 ; 1865,4750 cw(c1932.5,4752.5) 1930,4820 5476,4820 ; 1937.44,2780 5470,2780 ; 5460,4820 cw(c5462.5,4752.5) 5530,4755 ; 5465,2780 ccw(c5462.5,2847.5) 5530,2850 ; 5530,2841.31 5530,4760

## Dimensions
1865,2780 to 1860,4820 on Top Overlay
1865,2780 to 5530,2780 on Top Overlay